# Altium PCB PCB1.PcbDoc (part 2 of 8)
Units mil, origin at the board's own origin, x right, y up, seen from the top; angles counter-clockwise.
Board outline 3820 x 2600 mil, 2 copper layers (Top Layer, Bottom Layer); 88 components, 130 nets, 566 pads, 113 vias.
Unrouted connection lines stored in the file: 16.
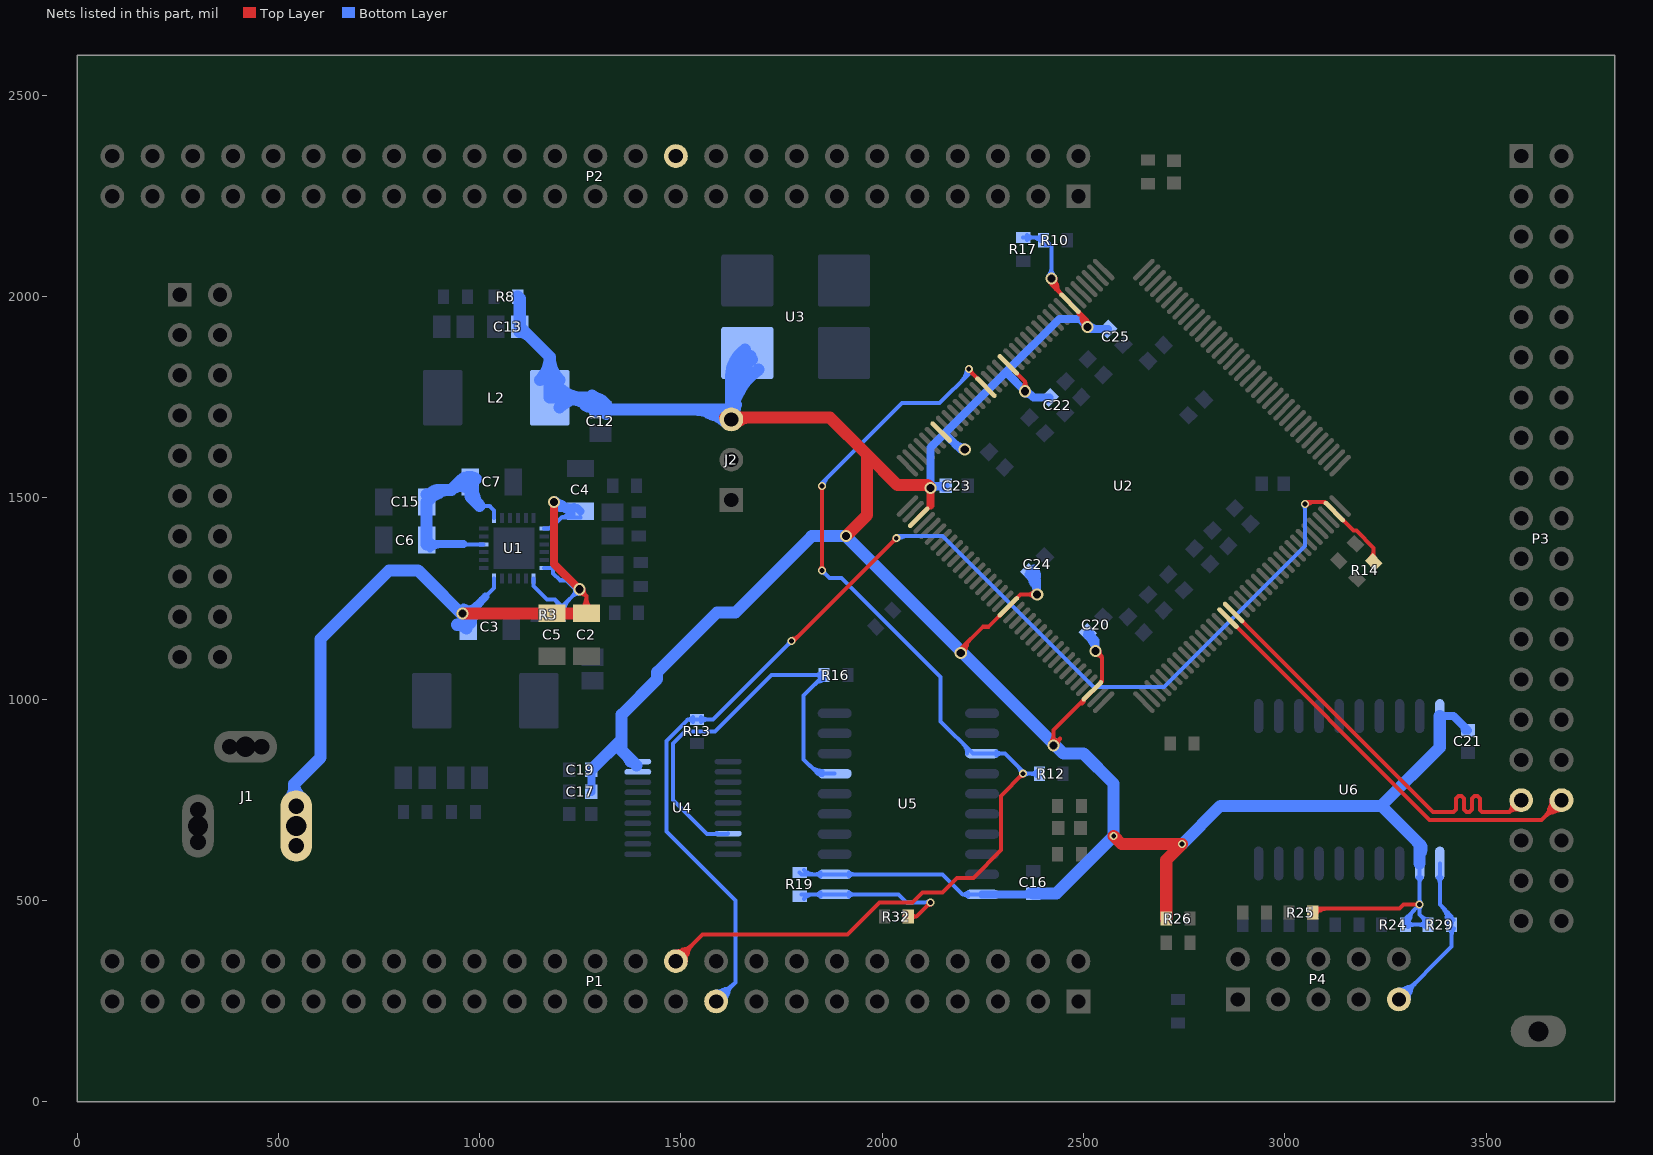
[diagram p2: the nets of this part, all layers, seen from the top]

## Via types
v1: diameter 30, hole 20, Top Layer to Bottom Layer, 74 vias
v2: diameter 20, hole 12, Top Layer to Bottom Layer, 36 vias
v3: diameter 17.72, hole 11.81, Top Layer to Bottom Layer, 3 vias

## Nets (pads, with @x,y where several pads share a name; then routed paths per layer and width w, separated by ;. In a path a pad name is that pad's centre, name@x,y a point inside that pad or via, vN(x,y) a via of type N, cw(c..) or ccw(c..) an arc to the next point about the centre after c; other vN are vias at no path point) (continued)
+3.3V: C12.2 C13.2 C16.1 C17.2 C19.2 C20.2 C21.1 C22.2 C23.2 C24.2 C25.2 J2.3 L2.2 R8.2 R10.2 R17.1 R19.1 R24.1 R25.1 R26.1 R29.1 U2.43 U2.54 U2.66 U2.75 U2.91 U2.106 U3.4 U4.19 U4.20 U5.2 U5.20 U6.2 U6.20 | length 17280.9
  Top Layer w10: U2.75@2090.55,1452.05 2120,1481.5 ; v1@2199.15,1124.1 ccw(c2201.87,1130.06) 2206.27,1125.2 ccw(c2210.67,1120.34) v1@2204.46,1118.23 ; U2.54@2313.26,1830.66 2355,1788.92 ; v1(2355,1765) 2355,1788.92 ; v1(2385,1260) 2343.92,1260 U2.91@2313.26,1229.34 2263.92,1180 2250,1180 2195,1125 v1(2195,1115) ; v1@2422.71,2035.37 cw(c2425.3,2026.16) 2432.07,2032.93 cw(c2438.84,2039.7) v1@2429.63,2042.29 ; v1@2425,895 ccw(c2425,919.14) 2442.07,902.07 ccw(c2459.14,885) v1@2435,885 ; 2495.94,989.23 ccw(c2485.51,999.67) U2.106@2500.27,999.67 ; 2498.19,991.47 ccw(c2492.39,997.27) U2.106@2500.3,999.43 ; 2498.19,992.14 cw(c2506.51,992.14) U2.106@2501.7,998.93 ; 2498.19,992.75 ccw(c2492.82,998.12) U2.106@2500.28,999.5 ; v1@2500.37,1927.71 ccw(c2491.16,1930.3) 2497.93,1937.07 ccw(c2504.7,1943.84) v1@2507.29,1934.63 ; R25.1@3069.53,470 3079.53,480 3285,480 3295,490 v2(3335,490) ; v1(2195,1115) cw(c2219.14,1115) 2202.07,1132.07 ; v1(2195,1115) ccw(c2181.6,1141.13) 2209.97,1133.53 ; v1(2195,1115) ccw(c2181.6,1141.13) 2209.97,1133.53 ; v1(2195,1115) cw(c2219.14,1115) 2202.07,1132.07 ; v1(2195,1115) ccw(c2181.6,1141.13) 2209.97,1133.53 ; v1(2195,1115) cw(c2219.14,1115) 2202.07,1132.07 ; v1@2205,1115 cw(c2253.28,1115) 2219.14,1149.14 ; v1@2205,1115 cw(c2253.28,1115) 2219.14,1149.14 ; v1@2205,1115 cw(c2253.28,1115) 2219.14,1149.14 ; v1@2347.98,1772.12 ccw(c2331.39,1788.92) 2355,1788.92 ; v1@2347.98,1772.12 ccw(c2331.39,1788.92) 2355,1788.92 ; v1@2347.98,1772.12 ccw(c2331.39,1788.92) 2355,1788.92 ; 2355,1788.92 ccw(c2378.61,1788.92) v1@2362.02,1772.12 ; 2355,1788.92 ccw(c2378.61,1788.92) v1@2362.02,1772.12 ; 2355,1788.92 ccw(c2378.61,1788.92) v1@2362.02,1772.12 ; 2360.86,1260 cw(c2360.86,1235.86) v1@2377.93,1252.93 ; 2360.86,1260 ccw(c2360.86,1284.14) v1@2377.93,1267.07 ; 2360.86,1260 cw(c2360.86,1235.86) v1@2377.93,1252.93 ; 2360.86,1260 ccw(c2360.86,1284.14) v1@2377.93,1267.07 ; 2360.86,1260 ccw(c2360.86,1284.14) v1@2377.93,1267.07 ; 2360.86,1260 cw(c2360.86,1235.86) v1@2377.93,1252.93 ; v1@2416.85,2035.51 cw(c2413,2023.91) 2424.8,2027.07 ; v1@2416.85,2035.51 cw(c2413,2023.91) 2424.8,2027.07 ; v1@2416.85,2035.51 cw(c2413,2023.91) 2424.8,2027.07 ; v1(2420,2045) cw(c2403.51,2016.44) 2435.37,2024.98 ; v1(2420,2045) cw(c2403.51,2016.44) 2435.37,2024.98 ; v1(2420,2045) ccw(c2455.86,2045) 2430.5,2019.65 ; v1(2420,2045) cw(c2403.51,2016.44) 2435.37,2024.98 ; v1(2420,2045) ccw(c2455.86,2045) 2430.5,2019.65 ; v1(2420,2045) ccw(c2455.86,2045) 2430.5,2019.65 ; v1(2420,2045) 2420,2030.15 U2.43@2466.37,1983.77 2510,1940.15 ; 2424.8,2027.07 cw(c2436.61,2030.24) v1@2427.47,2038.36 ; 2424.8,2027.07 cw(c2436.61,2030.24) v1@2427.47,2038.36 ; 2424.8,2027.07 cw(c2436.61,2030.24) v1@2427.47,2038.36 ; v1(2425,885) ccw(c2421.49,902.12) 2438.38,897.6 cw(c2421.49,902.12) v1(2425,885) ; v1(2425,885) cw(c2442.12,881.49) 2437.6,898.38 ccw(c2442.12,881.49) v1(2425,885) ; v1(2425,885) 2425,923.5 U2.106@2522.05,1020.55 2545.92,1044.41 2545.92,1104.08 ; 2425,909.14 cw(c2400.86,909.14) 2417.93,892.07 ccw(c2400.86,909.14) 2425,909.14 ; 2425,909.14 ccw(c2449.14,909.14) 2432.07,892.07 cw(c2449.14,909.14) 2425,909.14 ; v1@2430,2045 ccw(c2490,2045) U2.43@2447.57,2002.58 ; v1@2430,2045 ccw(c2490,2045) U2.43@2447.57,2002.58 ; v1@2430,2045 ccw(c2490,2045) U2.43@2447.57,2002.58 ; U2.43@2482.22,1967.93 cw(c2439.29,1925) v1@2500,1925 ; U2.43@2482.22,1967.93 cw(c2439.29,1925) v1@2500,1925 ; U2.43@2482.22,1967.93 cw(c2439.29,1925) v1@2500,1925 ; U2.43@2488.13,1962.66 ccw(c2496.32,1960.47) 2488.97,1956.23 ; U2.43@2488.13,1962.66 ccw(c2496.32,1960.47) 2488.97,1956.23 ; U2.43@2488.13,1962.66 ccw(c2496.32,1960.47) 2488.97,1956.23 ; 2494.63,1945.03 ccw(c2526.49,1953.56) v1(2510,1925) ; 2494.63,1945.03 ccw(c2526.49,1953.56) v1(2510,1925) ; 2494.63,1945.03 ccw(c2526.49,1953.56) v1(2510,1925) ; 2499.29,1950.86 cw(c2473.43,1925) v1(2510,1925) ; 2499.29,1950.86 cw(c2473.43,1925) v1(2510,1925) ; 2499.29,1950.86 cw(c2473.43,1925) v1(2510,1925) ; v1@2502.42,1931.52 ccw(c2492.62,1939.94) 2505.1,1943.28 ; v1@2502.42,1931.52 ccw(c2492.62,1939.94) 2505.1,1943.28 ; v1@2502.42,1931.52 ccw(c2492.62,1939.94) 2505.1,1943.28 ; 2505.1,1943.28 ccw(c2517.58,1946.63) v1@2513.31,1934.44 ; 2505.1,1943.28 ccw(c2517.58,1946.63) v1@2513.31,1934.44 ; 2505.1,1943.28 ccw(c2517.58,1946.63) v1@2513.31,1934.44 ; v1@2506.07,1934.2 ccw(c2503.53,1940.15) 2510,1940.15 ; v1@2506.07,1934.2 ccw(c2503.53,1940.15) 2510,1940.15 ; v1@2506.07,1934.2 ccw(c2503.53,1940.15) 2510,1940.15 ; v1(2510,1925) 2510,1940.15 ; 2510,1940.15 ccw(c2516.47,1940.15) v1@2513.93,1934.2 ; 2510,1940.15 ccw(c2516.47,1940.15) v1@2513.93,1934.2 ; 2510,1940.15 ccw(c2516.47,1940.15) v1@2513.93,1934.2 ; v1(2530,1120) cw(c2523.64,1101.24) 2543.01,1105.39 ; v1(2530,1120) ccw(c2548.76,1126.36) 2544.61,1106.99 ; v1(2530,1120) ccw(c2548.76,1126.36) 2544.61,1106.99 ; v1(2530,1120) cw(c2523.64,1101.24) 2543.01,1105.39 ; v1(2530,1120) ccw(c2548.76,1126.36) 2544.61,1106.99 ; v1(2530,1120) cw(c2523.64,1101.24) 2543.01,1105.39 ; v1(2530,1120) 2545.92,1104.08 ; v1@2530.51,1110.01 cw(c2531.54,1089.71) 2545.92,1104.08 ; v1@2530.51,1110.01 cw(c2531.54,1089.71) 2545.92,1104.08 ; v1@2530.51,1110.01 cw(c2531.54,1089.71) 2545.92,1104.08 ; v1@2539.99,1119.49 ccw(c2560.29,1118.46) 2545.92,1104.08 ; v1@2539.99,1119.49 ccw(c2560.29,1118.46) 2545.92,1104.08 ; v1@2539.99,1119.49 ccw(c2560.29,1118.46) 2545.92,1104.08 ; U2.106@2542.29,1042.07 ccw(c2533.54,1050.82) 2545.92,1050.82 ; U2.106@2542.29,1042.07 ccw(c2533.54,1050.82) 2545.92,1050.82 ; U2.106@2542.29,1042.07 ccw(c2533.54,1050.82) 2545.92,1050.82 ; R25.1@3075.74,467.73 cw(c3105.36,438.1) 3105.36,480 ; R25.1@3075.74,467.73 cw(c3105.36,438.1) 3105.36,480 ; R25.1@3075.74,467.73 cw(c3105.36,438.1) 3105.36,480 ; R25.1@3076.66,479.06 ccw(c3085.09,485.11) 3090.28,476.12 ; R25.1@3076.66,479.06 ccw(c3085.09,485.11) 3090.28,476.12 ; R25.1@3076.66,479.06 ccw(c3085.09,485.11) 3090.28,476.12 ; 3322.93,490 cw(c3322.93,477.93) v2@3331.46,486.46 ; 3322.93,490 ccw(c3322.93,502.07) v2@3331.46,493.54 ; 3322.93,490 cw(c3322.93,477.93) v2@3331.46,486.46 ; 3322.93,490 ccw(c3322.93,502.07) v2@3331.46,493.54 ; 3322.93,490 ccw(c3322.93,502.07) v2@3331.46,493.54 ; 3322.93,490 cw(c3322.93,477.93) v2@3331.46,486.46
  Top Layer w20: 2120,1481.5 v1(2120,1525)
  Top Layer w30: J2.3@1610,1700 1870,1700 1962.5,1607.5 ; v1(1910,1405) 1962.5,1457.5 1962.5,1607.5 ; v2(2575,660) 2595,640 v2(2745,640) 2705.47,600.47 R26.1@2705.47,455 ; J2.3@1635.27,1684.73 cw(c1672.14,1647.86) 1672.14,1700 ; J2.3@1635.27,1684.73 cw(c1672.14,1647.86) 1672.14,1700 ; J2.3@1635.27,1684.73 cw(c1672.14,1647.86) 1672.14,1700 ; 1962.5,1607.5 2037.67,1532.33 2112.67,1532.33 v1(2120,1525) ; 2102.31,1532.33 cw(c2102.31,1507.31) v1(2120,1525) ; 2102.31,1532.33 cw(c2102.31,1507.31) v1(2120,1525) ; 2102.31,1532.33 cw(c2102.31,1507.31) v1(2120,1525)
  Bottom Layer w10: U4.20@1379.84,845.16 U4.20@1392.8,845.16 ; R19.1@1795,569.53 1799.53,565 U5.2@1881.93,565 2150,565 2200,515 U5.20@2248.07,515 ; v1(2120,1525) v1@2125,1530 ; R17.1@2350,2147.09 2398.38,2147.09 2420,2125.47 ; v1(2420,2045) 2420,2125.47 ; v2(3335,490) 3299.53,454.53 R24.1@3299.53,440 R29.1@3355.47,440 ; U6.2@3335,591.93 3335,465.47 R29.1@3355.47,445 ; R19.1@1805.15,575.74 ccw(c1831.06,601.66) 1831.06,565 ; R19.1@1805.15,575.74 ccw(c1831.06,601.66) 1831.06,565 ; R19.1@1805.15,575.74 ccw(c1831.06,601.66) 1831.06,565 ; 1834.97,565 cw(c1834.97,548.56) U5.2@1846.6,560.18 ; 1834.97,565 ccw(c1834.97,581.44) U5.2@1846.6,569.82 ; 1834.97,565 cw(c1834.97,548.56) U5.2@1846.6,560.18 ; 1834.97,565 ccw(c1834.97,581.44) U5.2@1846.6,569.82 ; 1834.97,565 ccw(c1834.97,581.44) U5.2@1846.6,569.82 ; 1834.97,565 cw(c1834.97,548.56) U5.2@1846.6,560.18 ; U5.2@1917.26,560.18 cw(c1928.89,548.56) 1928.89,565 ; U5.2@1917.26,560.18 cw(c1928.89,548.56) 1928.89,565 ; U5.2@1917.26,560.18 cw(c1928.89,548.56) 1928.89,565 ; U5.2@1917.26,569.82 ccw(c1928.89,581.44) 1928.89,565 ; U5.2@1917.26,569.82 ccw(c1928.89,581.44) 1928.89,565 ; U5.2@1917.26,569.82 ccw(c1928.89,581.44) 1928.89,565 ; 2201.11,515 cw(c2201.11,498.56) U5.20@2212.74,510.18 ; 2201.11,515 ccw(c2201.11,531.44) U5.20@2212.74,519.82 ; 2201.11,515 cw(c2201.11,498.56) U5.20@2212.74,510.18 ; 2201.11,515 ccw(c2201.11,531.44) U5.20@2212.74,519.82 ; 2201.11,515 ccw(c2201.11,531.44) U5.20@2212.74,519.82 ; 2201.11,515 cw(c2201.11,498.56) U5.20@2212.74,510.18 ; R17.1@2360.14,2140.88 cw(c2375.13,2125.89) 2375.13,2147.09 ; R17.1@2360.14,2140.88 cw(c2375.13,2125.89) 2375.13,2147.09 ; R17.1@2360.14,2140.88 cw(c2375.13,2125.89) 2375.13,2147.09 ; R17.1@2360.14,2153.3 ccw(c2375.13,2168.29) 2375.13,2147.09 ; R17.1@2360.14,2153.3 ccw(c2375.13,2168.29) 2375.13,2147.09 ; R17.1@2360.14,2153.3 ccw(c2375.13,2168.29) 2375.13,2147.09 ; 2371.66,2147.09 cw(c2371.66,2115.13) R10.2@2394.26,2137.73 ; 2371.66,2147.09 cw(c2371.66,2115.13) R10.2@2394.26,2137.73 ; 2371.66,2147.09 cw(c2371.66,2115.13) R10.2@2394.26,2137.73 ; R10.2@2386.89,2147.09 ccw(c2386.89,2157.52) R10.2@2394.26,2150.15 ; R10.2@2386.89,2147.09 ccw(c2386.89,2157.52) R10.2@2394.26,2150.15 ; R10.2@2386.89,2147.09 ccw(c2386.89,2157.52) R10.2@2394.26,2150.15 ; R10.2@2404.28,2128.15 cw(c2410.25,2115.72) 2420,2125.47 ; R10.2@2404.28,2128.15 cw(c2410.25,2115.72) 2420,2125.47 ; R10.2@2404.28,2128.15 cw(c2410.25,2115.72) 2420,2125.47 ; v1@2412.93,2052.07 ccw(c2395.86,2069.14) 2420,2069.14 ; v1@2412.93,2052.07 ccw(c2395.86,2069.14) 2420,2069.14 ; v1@2412.93,2052.07 ccw(c2395.86,2069.14) 2420,2069.14 ; 2420,2069.14 ccw(c2444.14,2069.14) v1@2427.07,2052.07 ; 2420,2069.14 ccw(c2444.14,2069.14) v1@2427.07,2052.07 ; 2420,2069.14 ccw(c2444.14,2069.14) v1@2427.07,2052.07 ; R24.1@3298.31,443.94 cw(c3320.93,443.94) 3304.93,459.93 ; R24.1@3298.31,443.94 cw(c3320.93,443.94) 3304.93,459.93 ; R24.1@3298.31,443.94 cw(c3320.93,443.94) 3304.93,459.93 ; R24.1@3300.13,442.87 ccw(c3287.57,465.07) 3312.2,458.47 ; R24.1@3300.13,442.87 ccw(c3287.57,465.07) 3312.2,458.47 ; R24.1@3300.13,442.87 ccw(c3287.57,465.07) 3312.2,458.47 ; R24.1@3305.74,433.79 cw(c3320.72,418.8) 3320.72,440 ; R24.1@3305.74,433.79 cw(c3320.72,418.8) 3320.72,440 ; R24.1@3305.74,433.79 cw(c3320.72,418.8) 3320.72,440 ; R24.1@3305.74,446.21 ccw(c3320.72,461.2) 3320.72,440 ; R24.1@3305.74,446.21 ccw(c3320.72,461.2) 3320.72,440 ; R24.1@3305.74,446.21 ccw(c3320.72,461.2) 3320.72,440 ; R24.1@3308.31,443.94 cw(c3355.07,443.94) 3322,477 ; R24.1@3308.31,443.94 cw(c3355.07,443.94) 3322,477 ; R24.1@3308.31,443.94 cw(c3355.07,443.94) 3322,477 ; 3326.46,481.46 cw(c3335,472.93) v2@3335,485 ; 3326.46,481.46 ccw(c3317.93,490) v2@3330,490 ; 3326.46,481.46 cw(c3335,472.93) v2@3335,485 ; 3326.46,481.46 ccw(c3317.93,490) v2@3330,490 ; 3326.46,481.46 ccw(c3317.93,490) v2@3330,490 ; 3326.46,481.46 cw(c3335,472.93) v2@3335,485 ; U6.2@3330.18,556.6 cw(c3318.56,544.97) 3335,544.97 ; U6.2@3330.18,556.6 cw(c3318.56,544.97) 3335,544.97 ; U6.2@3330.18,556.6 cw(c3318.56,544.97) 3335,544.97 ; v2@3331.46,486.46 cw(c3322.93,477.93) 3335,477.93 ; v2@3331.46,486.46 cw(c3322.93,477.93) 3335,477.93 ; v2@3331.46,486.46 cw(c3322.93,477.93) 3335,477.93 ; v2@3331.46,493.54 ccw(c3322.93,502.07) 3335,502.07 ; v2@3331.46,493.54 ccw(c3322.93,502.07) 3335,502.07 ; v2@3331.46,493.54 ccw(c3322.93,502.07) 3335,502.07 ; 3334.28,440 cw(c3334.28,418.8) R29.1@3349.26,433.79 ; 3334.28,440 ccw(c3334.28,461.2) R29.1@3349.26,446.21 ; 3334.28,440 cw(c3334.28,418.8) R29.1@3349.26,433.79 ; 3334.28,440 ccw(c3334.28,461.2) R29.1@3349.26,446.21 ; 3334.28,440 ccw(c3334.28,461.2) R29.1@3349.26,446.21 ; 3334.28,440 cw(c3334.28,418.8) R29.1@3349.26,433.79 ; 3335,477.93 cw(c3347.07,477.93) v2@3338.54,486.46 ; 3335,477.93 cw(c3347.07,477.93) v2@3338.54,486.46 ; 3335,477.93 cw(c3347.07,477.93) v2@3338.54,486.46 ; 3335,502.07 ccw(c3347.07,502.07) v2@3338.54,493.54 ; 3335,502.07 ccw(c3347.07,502.07) v2@3338.54,493.54 ; 3335,502.07 ccw(c3347.07,502.07) v2@3338.54,493.54 ; 3335,544.97 cw(c3351.44,544.97) U6.2@3339.82,556.6 ; 3335,544.97 cw(c3351.44,544.97) U6.2@3339.82,556.6 ; 3335,544.97 cw(c3351.44,544.97) U6.2@3339.82,556.6 ; 3339.73,460.74 cw(c3322.93,443.94) R29.1@3346.69,443.94 ; 3339.73,460.74 cw(c3322.93,443.94) R29.1@3346.69,443.94 ; 3339.73,460.74 cw(c3322.93,443.94) R29.1@3346.69,443.94 ; 3342.3,458.17 ccw(c3355.47,471.35) R29.1@3355.47,452.72 ; 3342.3,458.17 ccw(c3355.47,471.35) R29.1@3355.47,452.72 ; 3342.3,458.17 ccw(c3355.47,471.35) R29.1@3355.47,452.72
  Bottom Layer w20: C17.2@1277.56,770 C19.2@1277.56,825 ; v1(2120,1525) 2120,1625 2155,1660 ; v1@2125,1530 C23.2@2157.44,1530 ; v1(2205,1620) 2195,1620 2155,1660 ; U5.20@2248.07,515 2372.56,515 C16.1@2375,517.44 ; v1(2355,1765) 2310,1810 2310,1815 ; v1@2357.5,1767.5 2375.51,1749.49 C22.2@2415.51,1749.49 ; C24.2@2365.51,1315.51 2385,1296.03 v1(2385,1260) ; C20.2@2510.51,1165.51 2530,1146.03 v1(2530,1120) ; C25.2@2560.51,1919.49 2515.51,1919.49 v1(2510,1925) 2490,1945 2440,1945 2310,1815 ; U6.20@3385,958.07 3419.49,958.07 C21.1@3455,922.56 ; v1@2123.54,1521.46 cw(c2144.14,1500.86) C23.2@2144.14,1530 ; v1@2123.54,1521.46 cw(c2144.14,1500.86) C23.2@2144.14,1530 ; v1@2123.54,1521.46 cw(c2144.14,1500.86) C23.2@2144.14,1530 ; 2138.51,1528.49 cw(c2142.31,1514.32) C23.2@2153.18,1524.17 ; 2138.51,1528.49 cw(c2142.31,1514.32) C23.2@2153.18,1524.17 ; 2138.51,1528.49 cw(c2142.31,1514.32) C23.2@2153.18,1524.17 ; 2155,1660 2310,1815 ; 2179.39,1635.61 ccw(c2205,1661.21) v1@2205,1625 ; 2179.39,1635.61 ccw(c2205,1661.21) v1@2205,1625 ; 2179.39,1635.61 ccw(c2205,1661.21) v1@2205,1625 ; 2183.33,1630.81 cw(c2175.94,1603.22) v1@2200.67,1617.5 ; 2183.33,1630.81 cw(c2175.94,1603.22) v1@2200.67,1617.5 ; 2183.33,1630.81 cw(c2175.94,1603.22) v1@2200.67,1617.5 ; 2353.26,515 ccw(c2353.26,537.21) C16.1@2368.97,521.51 ; 2353.26,515 ccw(c2353.26,537.21) C16.1@2368.97,521.51 ; 2353.26,515 ccw(c2353.26,537.21) C16.1@2368.97,521.51 ; v1@2355,1760 cw(c2355,1735.86) 2372.07,1752.93 ; v1@2355,1760 cw(c2355,1735.86) 2372.07,1752.93 ; v1@2355,1760 cw(c2355,1735.86) 2372.07,1752.93 ; C24.2@2362.87,1310.03 cw(c2310.54,1257.06) v1@2385,1257.06 ; C24.2@2362.87,1310.03 cw(c2310.54,1257.06) v1@2385,1257.06 ; C24.2@2362.87,1310.03 cw(c2310.54,1257.06) v1@2385,1257.06 ; C24.2@2372.47,1312.67 ccw(c2404.23,1304.37) 2375.9,1287.77 ; C24.2@2372.47,1312.67 ccw(c2404.23,1304.37) 2375.9,1287.77 ; C24.2@2372.47,1312.67 ccw(c2404.23,1304.37) 2375.9,1287.77 ; C24.2@2376.92,1324.26 cw(c2357.82,1304.92) 2385,1304.92 ; C24.2@2376.92,1324.26 cw(c2357.82,1304.92) 2385,1304.92 ; C24.2@2376.92,1324.26 cw(c2357.82,1304.92) 2385,1304.92 ; C22.2@2396.88,1749.49 cw(c2396.88,1730.86) C22.2@2410.06,1744.03 ; C22.2@2396.88,1749.49 cw(c2396.88,1730.86) C22.2@2410.06,1744.03 ; C22.2@2396.88,1749.49 cw(c2396.88,1730.86) C22.2@2410.06,1744.03 ; C20.2@2508.46,1159.52 cw(c2476.14,1116.44) v1@2530,1116.44 ; C20.2@2508.46,1159.52 cw(c2476.14,1116.44) v1@2530,1116.44 ; C20.2@2508.46,1159.52 cw(c2476.14,1116.44) v1@2530,1116.44 ; v1@2513.54,1928.54 ccw(c2535.38,1950.38) 2535.38,1919.49 ; v1@2513.54,1928.54 ccw(c2535.38,1950.38) 2535.38,1919.49 ; v1@2513.54,1928.54 ccw(c2535.38,1950.38) 2535.38,1919.49 ; C20.2@2517.61,1163.43 ccw(c2550.21,1159.51) 2524.38,1139.23 ; C20.2@2517.61,1163.43 ccw(c2550.21,1159.51) 2524.38,1139.23 ; C20.2@2517.61,1163.43 ccw(c2550.21,1159.51) 2524.38,1139.23 ; C25.2@2541.88,1919.49 cw(c2541.88,1900.86) C25.2@2555.06,1914.03 ; C25.2@2541.88,1919.49 cw(c2541.88,1900.86) C25.2@2555.06,1914.03 ; C25.2@2541.88,1919.49 cw(c2541.88,1900.86) C25.2@2555.06,1914.03 ; C21.1@3441.83,935.73 cw(c3428.65,922.56) C21.1@3447.28,922.56 ; C21.1@3441.83,935.73 cw(c3428.65,922.56) C21.1@3447.28,922.56 ; C21.1@3441.83,935.73 cw(c3428.65,922.56) C21.1@3447.28,922.56
  Bottom Layer w30: R8.2@1094.53,2000 1099.53,1995 C13.2@1099.53,1925 1174,1850.53 L2.2@1174,1749 1270.53,1749 C12.2@1300,1719.53 1600.47,1719.53 J2.3@1625,1695 1625,1805 U3.4@1672.5,1852.5 ; C19.2@1277.56,825 1352.56,900 ; 1390,835 1379.84,845.16 1352.56,872.44 1352.56,900 ; C16.1@2375,517.44 2432.44,517.44 v2(2575,660) 2575,790 2500,865 2450,865 v1(1910,1405) 1825,1405 1635,1215 1589.09,1215 1441,1066.91 1441,1050.09 1352.56,961.65 1352.56,900 ; v2(2745,640) 2840,735 3240,735 ; U6.2@3335,591.93 3335,640 ; U6.20@3385,958.07 3385,880 3240,735 ; C13.2@1099.53,1912.44 cw(c1099.53,1882.12) C13.2@1120.97,1903.56 ; C13.2@1099.53,1912.44 cw(c1099.53,1882.12) C13.2@1120.97,1903.56 ; C13.2@1099.53,1912.44 cw(c1099.53,1882.12) C13.2@1120.97,1903.56 ; L2.2@1149.97,1793.03 ccw(c1093.23,1850.52) 1174,1850.52 ; L2.2@1149.97,1793.03 ccw(c1093.23,1850.52) 1174,1850.52 ; L2.2@1149.97,1793.03 ccw(c1093.23,1850.52) 1174,1850.52 ; 1174,1850.52 ccw(c1254.77,1850.52) L2.2@1198.03,1793.03 ; 1174,1850.52 ccw(c1254.77,1850.52) L2.2@1198.03,1793.03 ; 1174,1850.52 ccw(c1254.77,1850.52) L2.2@1198.03,1793.03 ; L2.2@1198.19,1724.81 cw(c1256.6,1666.4) 1256.6,1749 ; L2.2@1198.19,1724.81 cw(c1256.6,1666.4) 1256.6,1749 ; L2.2@1198.19,1724.81 cw(c1256.6,1666.4) 1256.6,1749 ; L2.2@1198.19,1773.19 ccw(c1256.6,1831.6) 1256.6,1749 ; L2.2@1198.19,1773.19 ccw(c1256.6,1831.6) 1256.6,1749 ; L2.2@1198.19,1773.19 ccw(c1256.6,1831.6) 1256.6,1749 ; L2.2@1206.88,1749 cw(c1206.88,1632.31) C12.2@1289.39,1714.82 ; L2.2@1206.88,1749 cw(c1206.88,1632.31) C12.2@1289.39,1714.82 ; L2.2@1206.88,1749 cw(c1206.88,1632.31) C12.2@1289.39,1714.82 ; 1263.53,1729.75 ccw(c1282.54,1762.66) C12.2@1292.37,1725.95 ; 1263.53,1729.75 ccw(c1282.54,1762.66) C12.2@1292.37,1725.95 ; 1263.53,1729.75 ccw(c1282.54,1762.66) C12.2@1292.37,1725.95 ; C12.2@1278.56,1740.97 cw(c1257.12,1719.53) C12.2@1287.44,1719.53 ; C12.2@1278.56,1740.97 cw(c1257.12,1719.53) C12.2@1287.44,1719.53 ; C12.2@1278.56,1740.97 cw(c1257.12,1719.53) C12.2@1287.44,1719.53 ; 1279.31,1749 cw(c1279.31,1704.74) C12.2@1310.6,1736.04 ; 1279.31,1749 cw(c1279.31,1704.74) C12.2@1310.6,1736.04 ; 1279.31,1749 cw(c1279.31,1704.74) C12.2@1310.6,1736.04 ; 1279.49,1754 cw(c1267.87,1733.87) C12.2@1288.26,1722.72 ; 1279.49,1754 cw(c1267.87,1733.87) C12.2@1288.26,1722.72 ; 1279.49,1754 cw(c1267.87,1733.87) C12.2@1288.26,1722.72 ; C12.2@1306.08,1738.65 cw(c1294.81,1719.14) C12.2@1314.58,1708.32 ; C12.2@1306.08,1738.65 cw(c1294.81,1719.14) C12.2@1314.58,1708.32 ; C12.2@1306.08,1738.65 cw(c1294.81,1719.14) C12.2@1314.58,1708.32 ; 1370.43,854.56 cw(c1361.03,845.16) U4.20@1374.33,845.16 ; 1370.43,854.56 cw(c1361.03,845.16) U4.20@1374.33,845.16 ; 1370.43,854.56 cw(c1361.03,845.16) U4.20@1374.33,845.16 ; 1530.71,1719.53 cw(c1530.71,1600.71) J2.3@1614.73,1684.73 ; 1530.71,1719.53 cw(c1530.71,1600.71) J2.3@1614.73,1684.73 ; 1530.71,1719.53 cw(c1530.71,1600.71) J2.3@1614.73,1684.73 ; 1568.48,1711.43 ccw(c1596.96,1760.75) J2.3@1619.3,1708.36 ; 1568.48,1711.43 ccw(c1596.96,1760.75) J2.3@1619.3,1708.36 ; 1568.48,1711.43 ccw(c1596.96,1760.75) J2.3@1619.3,1708.36 ; 1603.14,1719.53 cw(c1603.14,1673.14) J2.3@1635.94,1705.94 ; 1603.14,1719.53 cw(c1603.14,1673.14) J2.3@1635.94,1705.94 ; 1603.14,1719.53 cw(c1603.14,1673.14) J2.3@1635.94,1705.94 ; J2.3@1614.73,1705.27 ccw(c1589.93,1730.07) 1625,1730.07 ; J2.3@1614.73,1705.27 ccw(c1589.93,1730.07) 1625,1730.07 ; J2.3@1614.73,1705.27 ccw(c1589.93,1730.07) 1625,1730.07 ; J2.3@1617.74,1707.58 ccw(c1598.09,1741.61) 1636.04,1731.44 ; J2.3@1617.74,1707.58 ccw(c1598.09,1741.61) 1636.04,1731.44 ; J2.3@1617.74,1707.58 ccw(c1598.09,1741.61) 1636.04,1731.44 ; J2.3@1625,1690.23 cw(c1780.13,1690.23) U3.4@1693.06,1818.62 ; J2.3@1625,1690.23 cw(c1780.13,1690.23) U3.4@1693.06,1818.62 ; J2.3@1625,1690.23 cw(c1780.13,1690.23) U3.4@1693.06,1818.62 ; 1625,1730.07 ccw(c1660.07,1730.07) J2.3@1635.27,1705.27 ; 1625,1730.07 ccw(c1660.07,1730.07) J2.3@1635.27,1705.27 ; 1625,1730.07 ccw(c1660.07,1730.07) J2.3@1635.27,1705.27 ; 1625,1746.82 cw(c1741.75,1746.82) U3.4@1676.22,1843.45 ; 1625,1746.82 cw(c1741.75,1746.82) U3.4@1676.22,1843.45 ; 1625,1746.82 cw(c1741.75,1746.82) U3.4@1676.22,1843.45 ; U3.4@1625,1803.41 cw(c1703.38,1803.41) U3.4@1659.39,1868.28 ; U3.4@1625,1803.41 cw(c1703.38,1803.41) U3.4@1659.39,1868.28 ; U3.4@1625,1803.41 cw(c1703.38,1803.41) U3.4@1659.39,1868.28 ; 1634.5,1725.68 ccw(c1664.3,1717.69) J2.3@1637.58,1702.26 ; 1634.5,1725.68 ccw(c1664.3,1717.69) J2.3@1637.58,1702.26 ; 1634.5,1725.68 ccw(c1664.3,1717.69) J2.3@1637.58,1702.26 ; 3240,735 3335,640 ; 3328.03,646.97 cw(c3303.5,622.44) U6.2@3338.19,622.44 ; 3328.03,646.97 cw(c3303.5,622.44) U6.2@3338.19,622.44 ; 3328.03,646.97 cw(c3303.5,622.44) U6.2@3338.19,622.44 ; 3335,640 cw(c3323.58,628.58) U6.2@3337.81,620.93 ; 3335,640 cw(c3323.58,628.58) U6.2@3337.81,620.93 ; 3335,640 cw(c3323.58,628.58) U6.2@3337.81,620.93
+3VD: P2.22
+5V: C2.1 C3.1 C4.1 C5.1 C6.1 C7.1 C15.1 J1.1 J1.1A J1.1B R3.2 U1.1 U1.6 U1.10 U1.13 U1.19 U1.24 | length 6973.1
  Top Layer w10: C2.1@1265,1213.15 1265,1255.83 v1(1247.68,1273.15) ; v1@1247.68,1263.15 cw(c1247.68,1239.01) 1264.75,1256.08 ; v1@1247.68,1263.15 cw(c1247.68,1239.01) 1264.75,1256.08 ; v1@1247.68,1263.15 cw(c1247.68,1239.01) 1264.75,1256.08 ; v1(1247.68,1273.15) cw(c1244.17,1256.03) 1261.05,1260.55 ; v1(1247.68,1273.15) ccw(c1264.8,1276.66) 1260.28,1259.77 ; v1(1247.68,1273.15) ccw(c1264.8,1276.66) 1260.28,1259.77 ; v1(1247.68,1273.15) cw(c1244.17,1256.03) 1261.05,1260.55 ; v1(1247.68,1273.15) ccw(c1264.8,1276.66) 1260.28,1259.77 ; v1(1247.68,1273.15) cw(c1244.17,1256.03) 1261.05,1260.55 ; C2.1@1253.22,1224.93 ccw(c1224.79,1253.35) 1265,1253.35 ; C2.1@1253.22,1224.93 ccw(c1224.79,1253.35) 1265,1253.35 ; C2.1@1253.22,1224.93 ccw(c1224.79,1253.35) 1265,1253.35 ; v1@1257.68,1273.15 ccw(c1281.82,1273.15) 1264.75,1256.08 ; v1@1257.68,1273.15 ccw(c1281.82,1273.15) 1264.75,1256.08 ; v1@1257.68,1273.15 ccw(c1281.82,1273.15) 1264.75,1256.08 ; 1265,1253.35 ccw(c1305.21,1253.35) C2.1@1276.78,1224.93 ; 1265,1253.35 ccw(c1305.21,1253.35) C2.1@1276.78,1224.93 ; 1265,1253.35 ccw(c1305.21,1253.35) C2.1@1276.78,1224.93
  Top Layer w20: v1(1185,1490) 1185,1335.83 v1(1247.68,1273.15)
  Top Layer w30: v1(956.85,1213.15) C5.1@1180,1213.15 C2.1@1265,1213.15
  Bottom Layer w10: 960,1385 960.16,1384.84 U1.10@1010,1384.84 ; 1000,1480 1025,1480 1035.79,1469.21 U1.13@1035.79,1450 ; 1015,1255 1035.79,1275.79 U1.6@1035.79,1300 ; U1.1@1134.21,1300 1134.21,1280.79 1167.62,1247.38 1186.83,1247.38 ; U1.24@1160,1325.79 1179.21,1325.79 1182.37,1322.63 1182.37,1312.63 1199.48,1295.52 1214.48,1295.52 ; U1.19@1160,1424.21 1175.59,1424.21 1203.23,1451.85 ; C4.1@1250,1451.85 1203.23,1451.85 ; U1.19@1167,1424.21 ccw(c1167,1444.95) 1181.66,1430.29 ; U1.19@1167,1424.21 ccw(c1167,1444.95) 1181.66,1430.29 ; U1.19@1167,1424.21 ccw(c1167,1444.95) 1181.66,1430.29 ; 1186.83,1247.38 cw(c1168.7,1229.25) R3.2@1191.66,1217.84 ; 1186.83,1247.38 cw(c1168.7,1229.25) R3.2@1191.66,1217.84 ; 1186.83,1247.38 cw(c1168.7,1229.25) R3.2@1191.66,1217.84 ; 1186.83,1247.38 1204.37,1229.84 1204.53,1229.68 ; 1196.67,1237.54 cw(c1181.85,1222.72) R3.2@1200.62,1213.39 ; 1196.67,1237.54 cw(c1181.85,1222.72) R3.2@1200.62,1213.39 ; 1196.67,1237.54 cw(c1181.85,1222.72) R3.2@1200.62,1213.39 ; R3.2@1198.19,1222.61 ccw(c1197.06,1230) 1204.53,1230 ; R3.2@1198.19,1222.61 ccw(c1197.06,1230) 1204.53,1230 ; R3.2@1198.19,1222.61 ccw(c1197.06,1230) 1204.53,1230 ; R3.2@1198.31,1213.94 cw(c1222.07,1213.94) 1205.27,1230.74 ; R3.2@1198.31,1213.94 cw(c1222.07,1213.94) 1205.27,1230.74 ; R3.2@1198.31,1213.94 cw(c1222.07,1213.94) 1205.27,1230.74 ; R3.2@1198.36,1222.64 ccw(c1197.42,1229.68) 1204.53,1229.68 ; R3.2@1198.36,1222.64 ccw(c1197.42,1229.68) 1204.53,1229.68 ; R3.2@1198.36,1222.64 ccw(c1197.42,1229.68) 1204.53,1229.68 ; R3.2@1200.14,1212.88 ccw(c1187.13,1235.4) 1212.26,1228.67 ; R3.2@1200.14,1212.88 ccw(c1187.13,1235.4) 1212.26,1228.67 ; R3.2@1200.14,1212.88 ccw(c1187.13,1235.4) 1212.26,1228.67 ; 1203.23,1451.85 ccw(c1203.23,1470.33) C4.1@1221.62,1468.5 ; 1203.23,1451.85 ccw(c1203.23,1470.33) C4.1@1221.62,1468.5 ; 1203.23,1451.85 ccw(c1203.23,1470.33) C4.1@1221.62,1468.5 ; 1204.53,1229.68 1204.53,1230 ; 1204.53,1230 v1(1247.68,1273.15) ; R3.2@1206.51,1227.71 cw(c1194.99,1216.19) R3.2@1209.58,1208.95 ; R3.2@1206.51,1227.71 cw(c1194.99,1216.19) R3.2@1209.58,1208.95 ; R3.2@1206.51,1227.71 cw(c1194.99,1216.19) R3.2@1209.58,1208.95 ; R3.2@1208.31,1213.94 cw(c1256.21,1213.94) 1222.34,1247.81 ; R3.2@1208.31,1213.94 cw(c1256.21,1213.94) 1222.34,1247.81 ; R3.2@1208.31,1213.94 cw(c1256.21,1213.94) 1222.34,1247.81 ; 1214.27,1451.85 ccw(c1214.27,1469.23) C4.1@1231.57,1467.51 ; 1214.27,1451.85 ccw(c1214.27,1469.23) C4.1@1231.57,1467.51 ; 1214.27,1451.85 ccw(c1214.27,1469.23) C4.1@1231.57,1467.51 ; 1214.48,1295.52 ccw(c1244.57,1325.61) v1@1247.09,1283.13 ; 1214.48,1295.52 ccw(c1244.57,1325.61) v1@1247.09,1283.13 ; 1214.48,1295.52 ccw(c1244.57,1325.61) v1@1247.09,1283.13 ; 1214.48,1295.52 1236.85,1273.15 v1(1247.68,1273.15) ; 1226.94,1287.27 cw(c1220.38,1255.35) v1(1247.68,1273.15) ; 1226.94,1287.27 cw(c1220.38,1255.35) v1(1247.68,1273.15) ; 1226.94,1287.27 cw(c1220.38,1255.35) v1(1247.68,1273.15) ; 1230.22,1279.78 ccw(c1246.33,1295.9) v1(1247.68,1273.15) ; 1230.22,1279.78 ccw(c1246.33,1295.9) v1(1247.68,1273.15) ; 1230.22,1279.78 ccw(c1246.33,1295.9) v1(1247.68,1273.15) ; 1230.61,1256.08 cw(c1247.68,1239.01) v1@1247.68,1263.15 ; 1230.61,1256.08 ccw(c1213.54,1273.15) v1@1237.68,1273.15 ; 1230.61,1256.08 cw(c1247.68,1239.01) v1@1247.68,1263.15 ; 1230.61,1256.08 ccw(c1213.54,1273.15) v1@1237.68,1273.15 ; 1230.61,1256.08 ccw(c1213.54,1273.15) v1@1237.68,1273.15 ; 1230.61,1256.08 cw(c1247.68,1239.01) v1@1247.68,1263.15
  Bottom Layer w20: C6.1@868.15,1385 960,1385 ; C3.1@961.18,1210.65 cw(c985.91,1196.37) 978.52,1223.96 ; C3.1@976.85,1190 976.85,1216.85 ; 1015,1255 976.85,1216.85 ; v1@1185,1485 cw(c1185,1456.44) 1205.2,1476.63 ; v1(1185,1490) 1200,1475 ; v1@1197.33,1484.64 cw(c1184.21,1435.69) C4.1@1228.1,1461.02 ; 1199.38,1483.45 ccw(c1190.76,1468.51) 1186.29,1485.17 cw(c1193.69,1457.58) 1207.97,1482.32 ; 1200.52,1480.47 ccw(c1220.16,1514.48) C4.1@1234.06,1477.75 ; C4.1@1250,1466.85 1241.85,1475 1200,1475 ; C6.1@876.39,1374.95 cw(c900.66,1350.68) 900.66,1385 ; C6.1@876.39,1374.95 cw(c900.66,1350.68) 900.66,1385 ; C6.1@876.39,1374.95 cw(c900.66,1350.68) 900.66,1385 ; C6.1@876.39,1391.43 ccw(c891.91,1406.95) 891.91,1385 ; C6.1@876.39,1391.43 ccw(c891.91,1406.95) 891.91,1385 ; C6.1@876.39,1391.43 ccw(c891.91,1406.95) 891.91,1385 ; C3.1@967.35,1202.56 ccw(c961.35,1216.85) 976.85,1216.85 ; C3.1@967.35,1202.56 ccw(c961.35,1216.85) 976.85,1216.85 ; C3.1@967.35,1202.56 ccw(c961.35,1216.85) 976.85,1216.85 ; 976.85,1216.85 cw(c968.53,1225.17) 960.34,1216.73 ccw(c968.53,1225.17) 976.85,1216.85 ; C3.1@983.5,1191.81 cw(c1060.02,1191.81) 1005.91,1245.91 ; C3.1@983.5,1191.81 cw(c1060.02,1191.81) 1005.91,1245.91 ; C3.1@983.5,1191.81 cw(c1060.02,1191.81) 1005.91,1245.91 ; v1@1189.33,1492.5 ccw(c1231.14,1516.64) C4.1@1218.65,1470 ; v1@1189.33,1492.5 ccw(c1231.14,1516.64) C4.1@1218.65,1470 ; v1@1189.33,1492.5 ccw(c1231.14,1516.64) C4.1@1218.65,1470 ; 1200,1475 cw(c1200,1439.93) 1228.66,1460.14 ccw(c1200,1439.93) 1200,1475 ; C3.1@955.85,1208.25 cw(c950.63,1182.56) 976.85,1182.56 ccw(c950.63,1182.56) C3.1@955.85,1208.25 ; v1@956.85,1218.15 ccw(c956.85,1269.57) 993.21,1233.21 cw(c956.85,1269.57) v1@956.85,1218.15 ; 959.84,1227.85 cw(c955.61,1207.03) 976.85,1207.03 ccw(c955.61,1207.03) 959.84,1227.85 ; v1@1188.54,1493.54 ccw(c1233.28,1538.28) 1233.28,1475 cw(c1233.28,1538.28) v1@1188.54,1493.54
  Bottom Layer w30: C6.1@868.15,1385 C15.1@868.15,1490 898.15,1520 ; 943.72,1185 cw(c943.72,1151.87) C3.1@967.15,1175.3 ; C3.1@976.85,1190 846.85,1320 775,1320 605,1150 605,855 539.37,789.37 ; J1.1@527.14,751.44 ccw(c497.61,780.98) 539.37,780.98 ; J1.1@527.14,751.44 ccw(c497.61,780.98) 539.37,780.98 ; J1.1@527.14,751.44 ccw(c497.61,780.98) 539.37,780.98 ; J1.1@539.37,675.79 ccw(c575.57,675.79) J1.1@553.31,647.24 ; J1.1@539.37,675.79 ccw(c575.57,675.79) J1.1@553.31,647.24 ; J1.1@539.37,675.79 ccw(c575.57,675.79) J1.1@553.31,647.24 ; J1.1@539.37,675.79 539.37,789.37 ; J1.1@539.37,682.93 ccw(c591.51,682.93) J1.1@554.64,646.06 ; J1.1@539.37,682.93 ccw(c591.51,682.93) J1.1@554.64,646.06 ; J1.1@539.37,682.93 ccw(c591.51,682.93) J1.1@554.64,646.06 ; J1.1@539.37,687.07 cw(c591.51,687.07) J1.1@554.64,723.94 ; J1.1@539.37,687.07 cw(c591.51,687.07) J1.1@554.64,723.94 ; J1.1@539.37,687.07 cw(c591.51,687.07) J1.1@554.64,723.94 ; 539.37,781.36 ccw(c591.51,781.36) J1.1@554.64,744.48 ; 539.37,781.36 ccw(c591.51,781.36) J1.1@554.64,744.48 ; 539.37,781.36 ccw(c591.51,781.36) J1.1@554.64,744.48 ; 539.37,789.37 ccw(c581.47,789.37) J1.1@557.97,754.43 ; 539.37,789.37 ccw(c581.47,789.37) J1.1@557.97,754.43 ; 539.37,789.37 ccw(c581.47,789.37) J1.1@557.97,754.43 ; C15.1@868.44,1508.46 ccw(c870.19,1547.95) 898.15,1520 ; C15.1@868.44,1508.46 ccw(c870.19,1547.95) 898.15,1520 ; C15.1@868.44,1508.46 ccw(c870.19,1547.95) 898.15,1520 ; C15.1@869.87,1508.24 ccw(c879.71,1544.95) 898.71,1512.03 ; C15.1@869.87,1508.24 ccw(c879.71,1544.95) 898.71,1512.03 ; C15.1@869.87,1508.24 ccw(c879.71,1544.95) 898.71,1512.03 ; C15.1@872.85,1497.11 cw(c928.12,1441.84) 928.12,1520 ; C15.1@872.85,1497.11 cw(c928.12,1441.84) 928.12,1520 ; C15.1@872.85,1497.11 cw(c928.12,1441.84) 928.12,1520 ; C15.1@874.69,1500.57 cw(c898.15,1496.12) 898.15,1520 ; C15.1@874.69,1500.57 cw(c898.15,1496.12) 898.15,1520 ; C15.1@874.69,1500.57 cw(c898.15,1496.12) 898.15,1520 ; 898.15,1520 930,1520 ; 930,1520 cw(c953.07,1496.93) C7.1@972.82,1522.89 ; 930,1520 cw(c953.07,1496.93) C7.1@972.82,1522.89 ; 930,1520 cw(c953.07,1496.93) C7.1@972.82,1522.89 ; 930,1520 950,1540 C7.1@976.85,1540 976.85,1503.15 1000,1480 ; 954.29,1544.29 cw(c974.06,1524.52) C7.1@990.99,1546.77 ; 954.29,1544.29 cw(c974.06,1524.52) C7.1@990.99,1546.77 ; 954.29,1544.29 cw(c974.06,1524.52) C7.1@990.99,1546.77 ; C7.1@972.89,1522.84 cw(c950.25,1492.31) 987.85,1497.9 ; C7.1@972.89,1522.84 cw(c950.25,1492.31) 987.85,1497.9 ; C7.1@972.89,1522.84 cw(c950.25,1492.31) 987.85,1497.9 ; C7.1@983.46,1527.43 ccw(c1040.84,1520.84) 1000,1480 ; C7.1@983.46,1527.43 ccw(c1040.84,1520.84) 1000,1480 ; C7.1@983.46,1527.43 ccw(c1040.84,1520.84) 1000,1480
/CONF_MCU_EN: R19.2 R32.1 U5.1 | length 824.2
  Top Layer w10: R32.1@2055,460 2084.53,460 ; v2(2120,495) 2119.53,495 2084.53,460 ; 2084.53,460 cw(c2084.53,478.39) 2070.99,465.94 ccw(c2084.53,478.39) 2084.53,460 ; 2084.53,460 ccw(c2084.53,441.61) 2070.99,454.06 cw(c2084.53,441.61) 2084.53,460 ; 2110.66,486.13 cw(c2120,476.79) v2@2120,490 ; 2110.66,486.13 cw(c2120,476.79) v2@2120,490 ; 2110.66,486.13 cw(c2120,476.79) v2@2120,490 ; 2111.8,487.27 ccw(c2104.07,495) v2@2115,495 ; 2111.8,487.27 ccw(c2104.07,495) v2@2115,495 ; 2111.8,487.27 ccw(c2104.07,495) v2@2115,495
  Bottom Layer w10: R19.2@1799.53,515 U5.1@1881.93,515 2040,515 2060,495 v2(2120,495) ; R19.2@1805.15,504.26 cw(c1831.06,478.34) 1831.06,515 ; R19.2@1805.15,504.26 cw(c1831.06,478.34) 1831.06,515 ; R19.2@1805.15,504.26 cw(c1831.06,478.34) 1831.06,515 ; 1834.97,515 cw(c1834.97,498.56) U5.1@1846.6,510.18 ; 1834.97,515 ccw(c1834.97,531.44) U5.1@1846.6,519.82 ; 1834.97,515 cw(c1834.97,498.56) U5.1@1846.6,510.18 ; 1834.97,515 ccw(c1834.97,531.44) U5.1@1846.6,519.82 ; 1834.97,515 ccw(c1834.97,531.44) U5.1@1846.6,519.82 ; 1834.97,515 cw(c1834.97,498.56) U5.1@1846.6,510.18 ; U5.1@1917.26,510.18 cw(c1928.89,498.56) 1928.89,515 ; U5.1@1917.26,510.18 cw(c1928.89,498.56) 1928.89,515 ; U5.1@1917.26,510.18 cw(c1928.89,498.56) 1928.89,515 ; U5.1@1917.26,519.82 ccw(c1928.89,531.44) 1928.89,515 ; U5.1@1917.26,519.82 ccw(c1928.89,531.44) 1928.89,515 ; U5.1@1917.26,519.82 ccw(c1928.89,531.44) 1928.89,515 ; 2107.93,495 cw(c2107.93,482.93) v2@2116.46,491.46 ; 2107.93,495 ccw(c2107.93,507.07) v2@2116.46,498.54 ; 2107.93,495 cw(c2107.93,482.93) v2@2116.46,491.46 ; 2107.93,495 ccw(c2107.93,507.07) v2@2116.46,498.54 ; 2107.93,495 ccw(c2107.93,507.07) v2@2116.46,498.54 ; 2107.93,495 cw(c2107.93,482.93) v2@2116.46,491.46
/EN_EJTAG: P4.9 R29.2 U6.1 | length 1706.9
  Bottom Layer w10: P4.9@3283.46,254.21 3414.53,385.28 3414.53,460.47 ; U6.1@3385,591.93 3385,490 3414.53,460.47 ; P4.9@3278.1,255.31 cw(c3315.76,247.6) 3305.81,284.73 ; P4.9@3278.1,255.31 cw(c3315.76,247.6) 3305.81,284.73 ; P4.9@3278.1,255.31 cw(c3315.76,247.6) 3305.81,284.73 ; P4.9@3283.46,268.74 ccw(c3283.46,303.81) 3308.26,279.01 ; P4.9@3283.46,268.74 ccw(c3283.46,303.81) 3308.26,279.01 ; P4.9@3283.46,268.74 ccw(c3283.46,303.81) 3308.26,279.01 ; P4.9@3283.46,278.74 ccw(c3283.46,337.95) 3325.34,296.08 ; P4.9@3283.46,278.74 ccw(c3283.46,337.95) 3325.34,296.08 ; P4.9@3283.46,278.74 ccw(c3283.46,337.95) 3325.34,296.08 ; P4.9@3284.56,248.85 ccw(c3276.85,286.51) 3313.98,276.56 ; P4.9@3284.56,248.85 ccw(c3276.85,286.51) 3313.98,276.56 ; P4.9@3284.56,248.85 ccw(c3276.85,286.51) 3313.98,276.56 ; P4.9@3297.99,254.21 cw(c3333.06,254.21) 3308.26,279.01 ; P4.9@3297.99,254.21 cw(c3333.06,254.21) 3308.26,279.01 ; P4.9@3297.99,254.21 cw(c3333.06,254.21) 3308.26,279.01 ; P4.9@3307.99,254.21 cw(c3367.21,254.21) 3325.34,296.08 ; P4.9@3307.99,254.21 cw(c3367.21,254.21) 3325.34,296.08 ; P4.9@3307.99,254.21 cw(c3367.21,254.21) 3325.34,296.08 ; U6.1@3380.18,556.6 cw(c3368.56,544.97) 3385,544.97 ; U6.1@3380.18,556.6 cw(c3368.56,544.97) 3385,544.97 ; U6.1@3380.18,556.6 cw(c3368.56,544.97) 3385,544.97 ; 3385,544.97 cw(c3401.44,544.97) U6.1@3389.82,556.6 ; 3385,544.97 cw(c3401.44,544.97) U6.1@3389.82,556.6 ; 3385,544.97 cw(c3401.44,544.97) U6.1@3389.82,556.6 ; 3387.85,487.15 cw(c3344.63,443.94) R29.2@3405.75,443.94 ; 3387.85,487.15 cw(c3344.63,443.94) R29.2@3405.75,443.94 ; 3387.85,487.15 cw(c3344.63,443.94) R29.2@3405.75,443.94 ; 3401.8,458.67 ccw(c3426.92,465.4) R29.2@3413.92,442.88 ; 3401.8,458.67 ccw(c3426.92,465.4) R29.2@3413.92,442.88 ; 3401.8,458.67 ccw(c3426.92,465.4) R29.2@3413.92,442.88 ; 3404.92,470.08 cw(c3378.78,443.94) R29.2@3415.75,443.94 ; 3404.92,470.08 cw(c3378.78,443.94) R29.2@3415.75,443.94 ; 3404.92,470.08 cw(c3378.78,443.94) R29.2@3415.75,443.94 ; R29.2@3408.32,429.85 cw(c3393.33,414.87) 3414.53,414.87 ; R29.2@3408.32,429.85 cw(c3393.33,414.87) 3414.53,414.87 ; R29.2@3408.32,429.85 cw(c3393.33,414.87) 3414.53,414.87 ; R29.2@3408.47,450.29 ccw(c3401.34,457.77) 3411.32,460.45 ; R29.2@3408.47,450.29 ccw(c3401.34,457.77) 3411.32,460.45 ; R29.2@3408.47,450.29 ccw(c3401.34,457.77) 3411.32,460.45 ; R29.2@3409.61,451.21 ccw(c3403.35,460.47) 3414.53,460.47 ; R29.2@3409.61,451.21 ccw(c3403.35,460.47) 3414.53,460.47 ; R29.2@3409.61,451.21 ccw(c3403.35,460.47) 3414.53,460.47 ; 3411.32,460.45 ccw(c3424.4,463.95) R29.2@3418.41,451.81 ; 3411.32,460.45 ccw(c3424.4,463.95) R29.2@3418.41,451.81 ; 3411.32,460.45 ccw(c3424.4,463.95) R29.2@3418.41,451.81 ; 3414.53,414.87 cw(c3435.72,414.87) R29.2@3420.74,429.85 ; 3414.53,414.87 cw(c3435.72,414.87) R29.2@3420.74,429.85 ; 3414.53,414.87 cw(c3435.72,414.87) R29.2@3420.74,429.85 ; 3414.53,460.47 ccw(c3425.71,460.47) R29.2@3419.45,451.21 ; 3414.53,460.47 ccw(c3425.71,460.47) R29.2@3419.45,451.21 ; 3414.53,460.47 ccw(c3425.71,460.47) R29.2@3419.45,451.21
/PINIT: R16.1 U4.8 U5.7 | length 1469.3
  Bottom Layer w10: U4.8@1617.2,666.02 1616.18,665 1565,665 1480,750 1480,890 1510,920 1585,920 1725,1060 R16.1@1855.47,1060 1805,1009.53 1805,850 1840,815 U5.7@1881.93,815 ; 1583.59,665 ccw(c1583.59,673.06) U4.8@1589.29,667.36 ; 1583.59,665 ccw(c1583.59,673.06) U4.8@1589.29,667.36 ; 1583.59,665 ccw(c1583.59,673.06) U4.8@1589.29,667.36 ; 1820.3,834.7 ccw(c1851.42,865.82) U5.7@1851.42,821.81 ; 1820.3,834.7 ccw(c1851.42,865.82) U5.7@1851.42,821.81 ; 1820.3,834.7 ccw(c1851.42,865.82) U5.7@1851.42,821.81 ; 1833.76,1038.29 cw(c1855.47,1016.58) R16.1@1855.47,1047.28 ; 1833.76,1038.29 cw(c1855.47,1016.58) R16.1@1855.47,1047.28 ; 1833.76,1038.29 cw(c1855.47,1016.58) R16.1@1855.47,1047.28 ; 1834.28,1060 cw(c1834.28,1038.8) 1849.26,1053.79 ccw(c1834.28,1038.8) 1834.28,1060 ; 1834.28,1060 ccw(c1834.28,1081.2) 1849.26,1066.21 cw(c1834.28,1081.2) 1834.28,1060 ; 1837.37,817.63 ccw(c1851.42,831.68) U5.7@1851.42,811.81 ; 1837.37,817.63 ccw(c1851.42,831.68) U5.7@1851.42,811.81 ; 1837.37,817.63 ccw(c1851.42,831.68) U5.7@1851.42,811.81 ; R16.1@1843.27,1047.8 ccw(c1835,1056.06) R16.1@1846.69,1056.06 ; R16.1@1843.27,1047.8 ccw(c1835,1056.06) R16.1@1846.69,1056.06 ; R16.1@1843.27,1047.8 ccw(c1835,1056.06) R16.1@1846.69,1056.06 ; R16.1@1844.32,1044.3 ccw(c1839.66,1061.68) R16.1@1856.62,1055.65 ; R16.1@1844.32,1044.3 ccw(c1839.66,1061.68) R16.1@1856.62,1055.65 ; R16.1@1844.32,1044.3 ccw(c1839.66,1061.68) R16.1@1856.62,1055.65
/XINIT: P1.22 R12.1 U2.58 U5.13 | length 4061.9
  Top Layer w10: P1.22@1482.04,350.31 cw(c1519.7,342.6) 1509.75,379.73 ; P1.22@1487.4,349.21 1553.19,415 1913.42,415 1993.42,495 2075,495 2100,520 2150,520 2186.25,556.25 2226.25,556.25 2295,625 2295,760 v2(2350,815) ; P1.22@1488.5,343.85 ccw(c1480.79,381.51) 1517.92,371.56 ; v2(1850,1320) v2(1850,1530) ; v2(2215,1820) 2215,1817.56 U2.58@2257.58,1774.98 ; 1512.2,374.01 cw(c1487.4,398.81) 1487.4,363.74 ccw(c1487.4,398.81) 1512.2,374.01 ; 1512.2,374.01 ccw(c1537,349.21) 1501.93,349.21 cw(c1537,349.21) 1512.2,374.01 ; 1529.27,391.08 cw(c1487.4,432.95) 1487.4,373.74 ccw(c1487.4,432.95) 1529.27,391.08 ; 1529.27,391.08 ccw(c1571.14,349.21) 1511.93,349.21 cw(c1571.14,349.21) 1529.27,391.08 ; v2@1846.46,1323.54 ccw(c1837.93,1332.07) 1850,1332.07 ; v2@1846.46,1323.54 ccw(c1837.93,1332.07) 1850,1332.07 ; v2@1846.46,1323.54 ccw(c1837.93,1332.07) 1850,1332.07 ; v2@1846.46,1526.46 cw(c1837.93,1517.93) 1850,1517.93 ; v2@1846.46,1526.46 cw(c1837.93,1517.93) 1850,1517.93 ; v2@1846.46,1526.46 cw(c1837.93,1517.93) 1850,1517.93 ; 1850,1332.07 ccw(c1862.07,1332.07) v2@1853.54,1323.54 ; 1850,1332.07 ccw(c1862.07,1332.07) v2@1853.54,1323.54 ; 1850,1332.07 ccw(c1862.07,1332.07) v2@1853.54,1323.54 ; 1850,1517.93 cw(c1862.07,1517.93) v2@1853.54,1526.46 ; 1850,1517.93 cw(c1862.07,1517.93) v2@1853.54,1526.46 ; 1850,1517.93 cw(c1862.07,1517.93) v2@1853.54,1526.46 ; v2@2220,1820 ccw(c2237.95,1820) 2225.26,1807.31 ; v2@2220,1820 ccw(c2237.95,1820) 2225.26,1807.31 ; v2@2220,1820 ccw(c2237.95,1820) 2225.26,1807.31 ; 2341.46,806.46 cw(c2350,797.93) 2350,810 ccw(c2350,797.93) 2341.46,806.46 ; 2341.46,806.46 ccw(c2332.93,815) 2345,815 cw(c2332.93,815) 2341.46,806.46
  Bottom Layer w10: v2(1850,1320) 1869,1301 1899,1301 2145,1055 2145,945 2225,865 U5.13@2248.07,865 2305,865 2350,820 v2(2350,815) R12.1@2390.47,815 ; v2(1850,1530) 1850,1536.77 2049.23,1736 2142.77,1736 2215,1808.23 ; 2207.05,1805.22 ccw(c2197.81,1814.45) v2@2210.24,1818.46 ; v2(2215,1820) 2215,1808.23 ; v2@1850,1315 cw(c1850,1302.93) 1858.54,1311.46 ; v2@1850,1315 cw(c1850,1302.93) 1858.54,1311.46 ; v2@1850,1315 cw(c1850,1302.93) 1858.54,1311.46 ; v2@1855,1320 ccw(c1867.07,1320) 1858.54,1311.46 ; v2@1855,1320 ccw(c1867.07,1320) 1858.54,1311.46 ; v2@1855,1320 ccw(c1867.07,1320) 1858.54,1311.46 ; v2@1855,1530 cw(c1883.41,1530) 1863.32,1550.09 ; v2@1855,1530 cw(c1883.41,1530) 1863.32,1550.09 ; v2@1855,1530 cw(c1883.41,1530) 1863.32,1550.09 ; 2198.14,1791.37 ccw(c2169.51,1820) v2@2210,1820 ; 2198.14,1791.37 ccw(c2169.51,1820) v2@2210,1820 ; 2198.14,1791.37 ccw(c2169.51,1820) v2@2210,1820 ; 2200.67,889.33 cw(c2176.34,865) U5.13@2210.75,865 ; 2200.67,889.33 cw(c2176.34,865) U5.13@2210.75,865 ; 2200.67,889.33 cw(c2176.34,865) U5.13@2210.75,865 ; 2204.19,1798.33 cw(c2231.78,1790.94) v2@2217.5,1815.67 ; 2204.19,1798.33 cw(c2231.78,1790.94) v2@2217.5,1815.67 ; 2204.19,1798.33 cw(c2231.78,1790.94) v2@2217.5,1815.67 ; v2@2211.53,1816.4 cw(c2203.65,1808.23) 2215,1808.23 ; v2@2211.53,1816.4 cw(c2203.65,1808.23) 2215,1808.23 ; v2@2211.53,1816.4 cw(c2203.65,1808.23) 2215,1808.23 ; 2215,1808.23 cw(c2226.35,1808.23) v2@2218.47,1816.4 ; 2215,1808.23 cw(c2226.35,1808.23) v2@2218.47,1816.4 ; 2215,1808.23 cw(c2226.35,1808.23) v2@2218.47,1816.4 ; 2215.21,1808.44 ccw(c2203.66,1820) v2@2220,1820 ; 2215.21,1808.44 ccw(c2203.66,1820) v2@2220,1820 ; 2215.21,1808.44 ccw(c2203.66,1820) v2@2220,1820 ; U5.13@2283.4,860.18 cw(c2295.03,848.56) 2295.03,865 ; U5.13@2283.4,860.18 cw(c2295.03,848.56) 2295.03,865 ; U5.13@2283.4,860.18 cw(c2295.03,848.56) 2295.03,865 ; U5.13@2283.4,869.82 ccw(c2295.03,881.44) 2295.03,865 ; U5.13@2283.4,869.82 ccw(c2295.03,881.44) 2295.03,865 ; U5.13@2283.4,869.82 ccw(c2295.03,881.44) 2295.03,865 ; 2337.93,832.07 cw(c2320.86,815) v2@2345,815 ; 2337.93,832.07 cw(c2320.86,815) v2@2345,815 ; 2337.93,832.07 cw(c2320.86,815) v2@2345,815 ; v2@2353.54,811.46 cw(c2362.07,802.93) 2362.07,815 ; v2@2353.54,811.46 cw(c2362.07,802.93) 2362.07,815 ; v2@2353.54,811.46 cw(c2362.07,802.93) 2362.07,815 ; v2@2353.54,818.54 ccw(c2362.07,827.07) 2362.07,815 ; v2@2353.54,818.54 ccw(c2362.07,827.07) 2362.07,815 ; v2@2353.54,818.54 ccw(c2362.07,827.07) 2362.07,815 ; 2369.28,815 cw(c2369.28,793.8) R12.1@2384.26,808.79 ; 2369.28,815 ccw(c2369.28,836.2) R12.1@2384.26,821.21 ; 2369.28,815 cw(c2369.28,793.8) R12.1@2384.26,808.79 ; 2369.28,815 ccw(c2369.28,836.2) R12.1@2384.26,821.21 ; 2369.28,815 ccw(c2369.28,836.2) R12.1@2384.26,821.21 ; 2369.28,815 cw(c2369.28,793.8) R12.1@2384.26,808.79
/XPROG: P1.19 R13.2 R14.1 U2.143 | length 4285
  Top Layer w10: v2(1775,1145) 1780,1145 v2(2035,1400) ; v2(3050,1485) 3054.84,1489.84 3099.5,1489.84 U2.143@3123.37,1465.97 3170.19,1419.15 3177.65,1419.15 3220.88,1375.92 R14.1@3220.88,1340.88 ; 2026.46,1391.46 cw(c2035,1382.93) v2@2035,1395 ; 2026.46,1391.46 ccw(c2017.93,1400) v2@2030,1400 ; 2026.46,1391.46 cw(c2035,1382.93) v2@2035,1395 ; 2026.46,1391.46 ccw(c2017.93,1400) v2@2030,1400 ; 2026.46,1391.46 ccw(c2017.93,1400) v2@2030,1400 ; 2026.46,1391.46 cw(c2035,1382.93) v2@2035,1395 ; v2@3053.41,1488.66 ccw(c3059.48,1495.19) 3063.93,1487.47 ; v2@3053.41,1488.66 ccw(c3059.48,1495.19) 3063.93,1487.47 ; v2@3053.41,1488.66 ccw(c3059.48,1495.19) 3063.93,1487.47 ; v2@3053.54,1481.46 cw(c3073.75,1461.25) 3073.75,1489.84 ; v2@3053.54,1481.46 cw(c3073.75,1461.25) 3073.75,1489.84 ; v2@3053.54,1481.46 cw(c3073.75,1461.25) 3073.75,1489.84 ; 3093.09,1489.84 cw(c3093.09,1477.45) U2.143@3101.85,1486.21 ; 3093.09,1489.84 cw(c3093.09,1477.45) U2.143@3101.85,1486.21 ; 3093.09,1489.84 cw(c3093.09,1477.45) U2.143@3101.85,1486.21 ; R14.1@3211.89,1349.87 ccw(c3190.18,1371.58) 3220.88,1371.58 ; R14.1@3211.89,1349.87 ccw(c3190.18,1371.58) 3220.88,1371.58 ; R14.1@3211.89,1349.87 ccw(c3190.18,1371.58) 3220.88,1371.58 ; R14.1@3220.88,1358.14 ccw(c3232.57,1358.14) R14.1@3224.3,1349.87 ; R14.1@3220.88,1358.14 ccw(c3232.57,1358.14) R14.1@3224.3,1349.87 ; R14.1@3220.88,1358.14 ccw(c3232.57,1358.14) R14.1@3224.3,1349.87 ; v2@1775,1150 ccw(c1775,1174.14) 1792.07,1157.07 cw(c1775,1174.14) v2@1775,1150
  Bottom Layer w10: P1.19@1582.04,250.31 cw(c1619.7,242.6) 1609.75,279.73 ; P1.19@1587.4,249.21 1635,296.81 1635,500 1464,671 1464,896.63 1516.9,949.53 ; P1.19@1588.5,243.85 ccw(c1580.79,281.51) 1617.92,271.56 ; v2(1775,1145) 1580,950 1540.47,950 R13.2@1540,949.53 1516.9,949.53 ; v2(2035,1400) 2040,1405 2150,1405 2525,1030 2700,1030 3050,1380 v2(3050,1485) ; 1516.9,949.53 cw(c1516.9,933.01) R13.2@1529.41,943.8 ; 1516.9,949.53 ccw(c1516.9,966.05) R13.2@1529.41,955.26 ; 1516.9,949.53 cw(c1516.9,933.01) R13.2@1529.41,943.8 ; 1516.9,949.53 ccw(c1516.9,966.05) R13.2@1529.41,955.26 ; 1516.9,949.53 ccw(c1516.9,966.05) R13.2@1529.41,955.26 ; 1516.9,949.53 cw(c1516.9,933.01) R13.2@1529.41,943.8 ; R13.2@1550.15,943.32 cw(c1566.27,927.19) 1566.27,950 ; R13.2@1550.15,943.32 cw(c1566.27,927.19) 1566.27,950 ; R13.2@1550.15,943.32 cw(c1566.27,927.19) 1566.27,950 ; R13.2@1550.15,955.74 ccw(c1563.99,969.58) 1563.99,950 ; R13.2@1550.15,955.74 ccw(c1563.99,969.58) 1563.99,950 ; R13.2@1550.15,955.74 ccw(c1563.99,969.58) 1563.99,950 ; 1612.2,274.01 cw(c1587.4,298.81) 1587.4,263.74 ccw(c1587.4,298.81) 1612.2,274.01 ; 1612.2,274.01 ccw(c1637,249.21) 1601.93,249.21 cw(c1637,249.21) 1612.2,274.01 ; 1629.27,291.08 cw(c1587.4,332.95) 1587.4,273.74 ccw(c1587.4,332.95) 1629.27,291.08 ; 1629.27,291.08 ccw(c1671.14,249.21) 1611.93,249.21 cw(c1671.14,249.21) 1629.27,291.08 ; 1766.46,1136.46 cw(c1775,1127.93) 1775,1140 ccw(c1775,1127.93) 1766.46,1136.46 ; 1766.46,1136.46 ccw(c1757.93,1145) 1770,1145 cw(c1757.93,1145) 1766.46,1136.46 ; v2@2038.33,1403.73 ccw(c2044.53,1410.68) 2049.18,1402.61 ; v2@2038.33,1403.73 ccw(c2044.53,1410.68) 2049.18,1402.61 ; v2@2038.33,1403.73 ccw(c2044.53,1410.68) 2049.18,1402.61 ; v2@2038.54,1396.46 cw(c2059.14,1375.86) 2059.14,1405 ; v2@2038.54,1396.46 cw(c2059.14,1375.86) 2059.14,1405 ; v2@2038.54,1396.46 cw(c2059.14,1375.86) 2059.14,1405 ; v2@3046.46,1481.46 cw(c3037.93,1472.93) 3050,1472.93 ; v2@3046.46,1481.46 cw(c3037.93,1472.93) 3050,1472.93 ; v2@3046.46,1481.46 cw(c3037.93,1472.93) 3050,1472.93 ; 3050,1472.93 cw(c3062.07,1472.93) v2@3053.54,1481.46 ; 3050,1472.93 cw(c3062.07,1472.93) v2@3053.54,1481.46 ; 3050,1472.93 cw(c3062.07,1472.93) v2@3053.54,1481.46
ADC1_CLK_N: P3.33 U2.125 | length 1201.6
  Top Layer w10: U2.125@2872.82,1215.42 3368.24,720 ; 3372.17,720 3419,720 3425,726 3425,753.08 3431,759.08 3439,759.08 3445,753.08 3445,726 3451,720 3459,720 3465,726 3465,753.08 3471,759.08 3479,759.08 3485,753.08 3485,725 3490,720 3558.19,720 ; P3.33@3587.4,749.21 3558.19,720 ; 3558.19,720 cw(c3574.12,704.07) P3.33@3580.48,725.68 ; 3558.19,720 ccw(c3542.26,735.93) P3.33@3563.87,742.29 ; 3558.19,720 cw(c3574.12,704.07) P3.33@3580.48,725.68 ; 3558.19,720 ccw(c3542.26,735.93) P3.33@3563.87,742.29 ; 3558.19,720 ccw(c3542.26,735.93) P3.33@3563.87,742.29 ; 3558.19,720 cw(c3574.12,704.07) P3.33@3580.48,725.68
ADC1_CLK_P: P3.34 U2.124 | length 1756.4
  Top Layer w10: U2.124@2858.68,1201.28 3359.96,700 3638.19,700 P3.34@3687.4,749.21 ; 3645.53,707.34 cw(c3687.4,665.47) P3.34@3687.4,724.68 ; 3645.53,707.34 ccw(c3603.66,749.21) P3.34@3662.87,749.21 ; 3645.53,707.34 cw(c3687.4,665.47) P3.34@3687.4,724.68 ; 3645.53,707.34 ccw(c3603.66,749.21) P3.34@3662.87,749.21 ; 3645.53,707.34 ccw(c3603.66,749.21) P3.34@3662.87,749.21 ; 3645.53,707.34 cw(c3687.4,665.47) P3.34@3687.4,724.68 ; 3656.89,726.86 cw(c3694.02,716.92) P3.34@3686.3,754.57 ; 3656.89,726.86 cw(c3694.02,716.92) P3.34@3686.3,754.57 ; 3656.89,726.86 cw(c3694.02,716.92) P3.34@3686.3,754.57 ; 3662.6,724.41 cw(c3687.4,699.61) P3.34@3687.4,734.68 ; 3662.6,724.41 ccw(c3637.8,749.21) P3.34@3672.87,749.21 ; 3662.6,724.41 cw(c3687.4,699.61) P3.34@3687.4,734.68 ; 3662.6,724.41 ccw(c3637.8,749.21) P3.34@3672.87,749.21 ; 3662.6,724.41 ccw(c3637.8,749.21) P3.34@3672.87,749.21 ; 3662.6,724.41 cw(c3687.4,699.61) P3.34@3687.4,734.68 ; 3665.05,718.7 ccw(c3655.11,755.83) P3.34@3692.76,748.11 ; 3665.05,718.7 ccw(c3655.11,755.83) P3.34@3692.76,748.11 ; 3665.05,718.7 ccw(c3655.11,755.83) P3.34@3692.76,748.11